# Altium PCB Watch_PCB_ASCII.PcbDoc
Units mm, origin at the board's own origin, x right, y up, seen from the top; angles counter-clockwise.
Board outline 38.1 x 68.58 mm, 2 copper layers (Top Layer, Bottom Layer); 86 components, 82 nets, 318 pads, 74 vias.
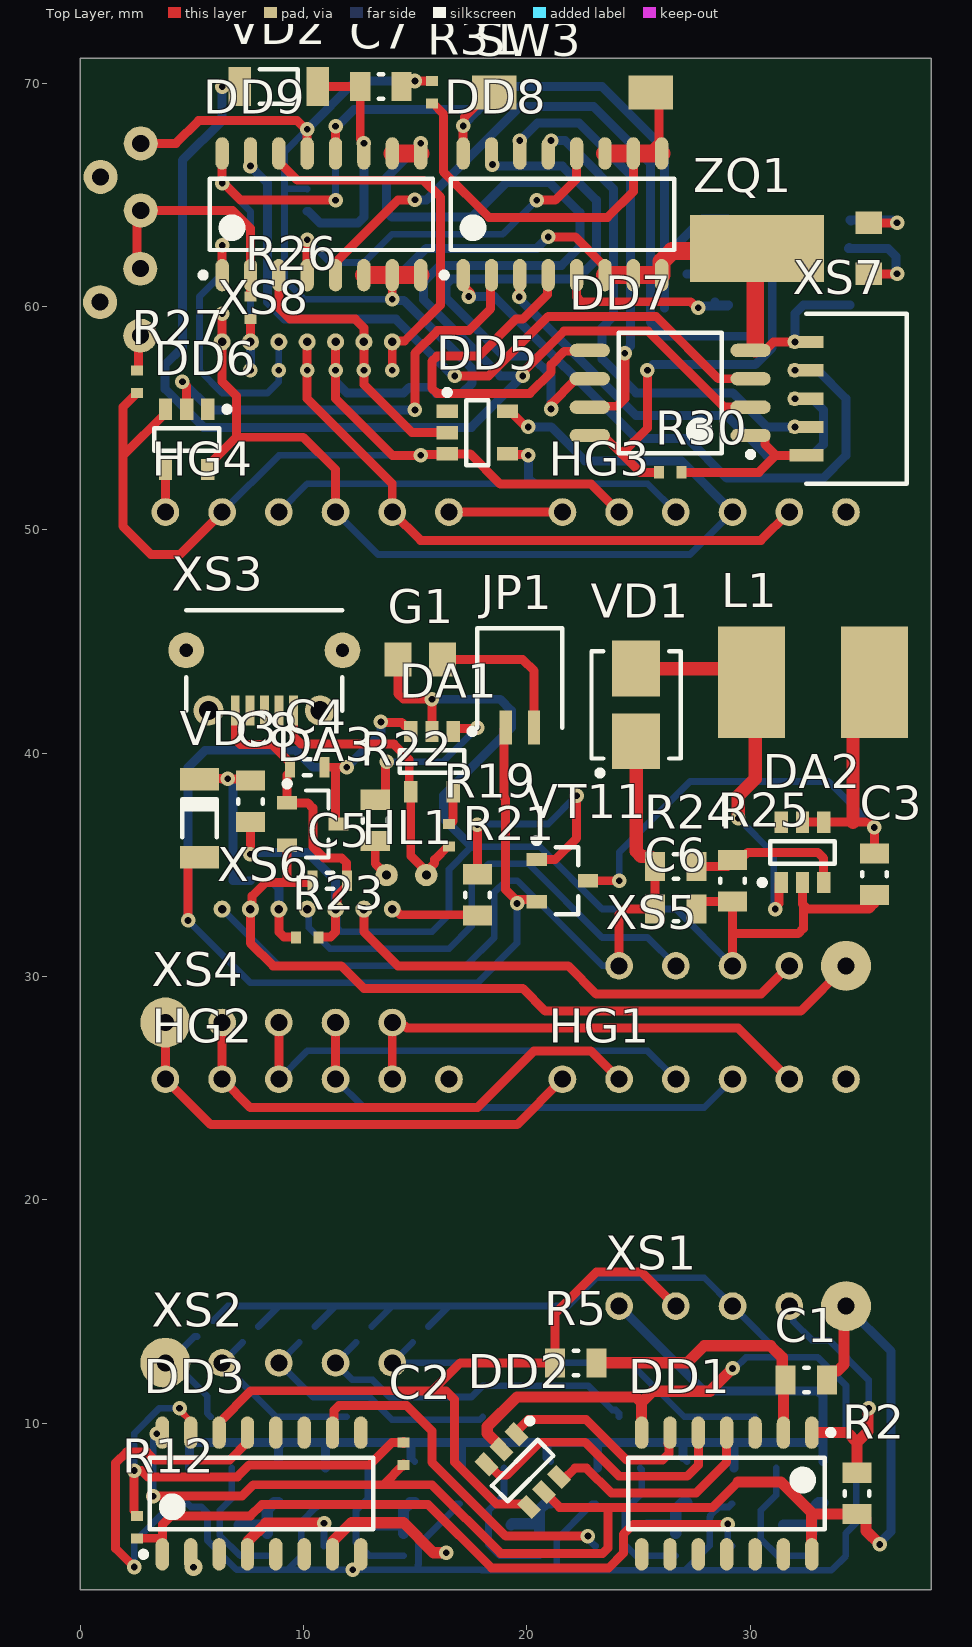
[diagram p0: Top Layer view]
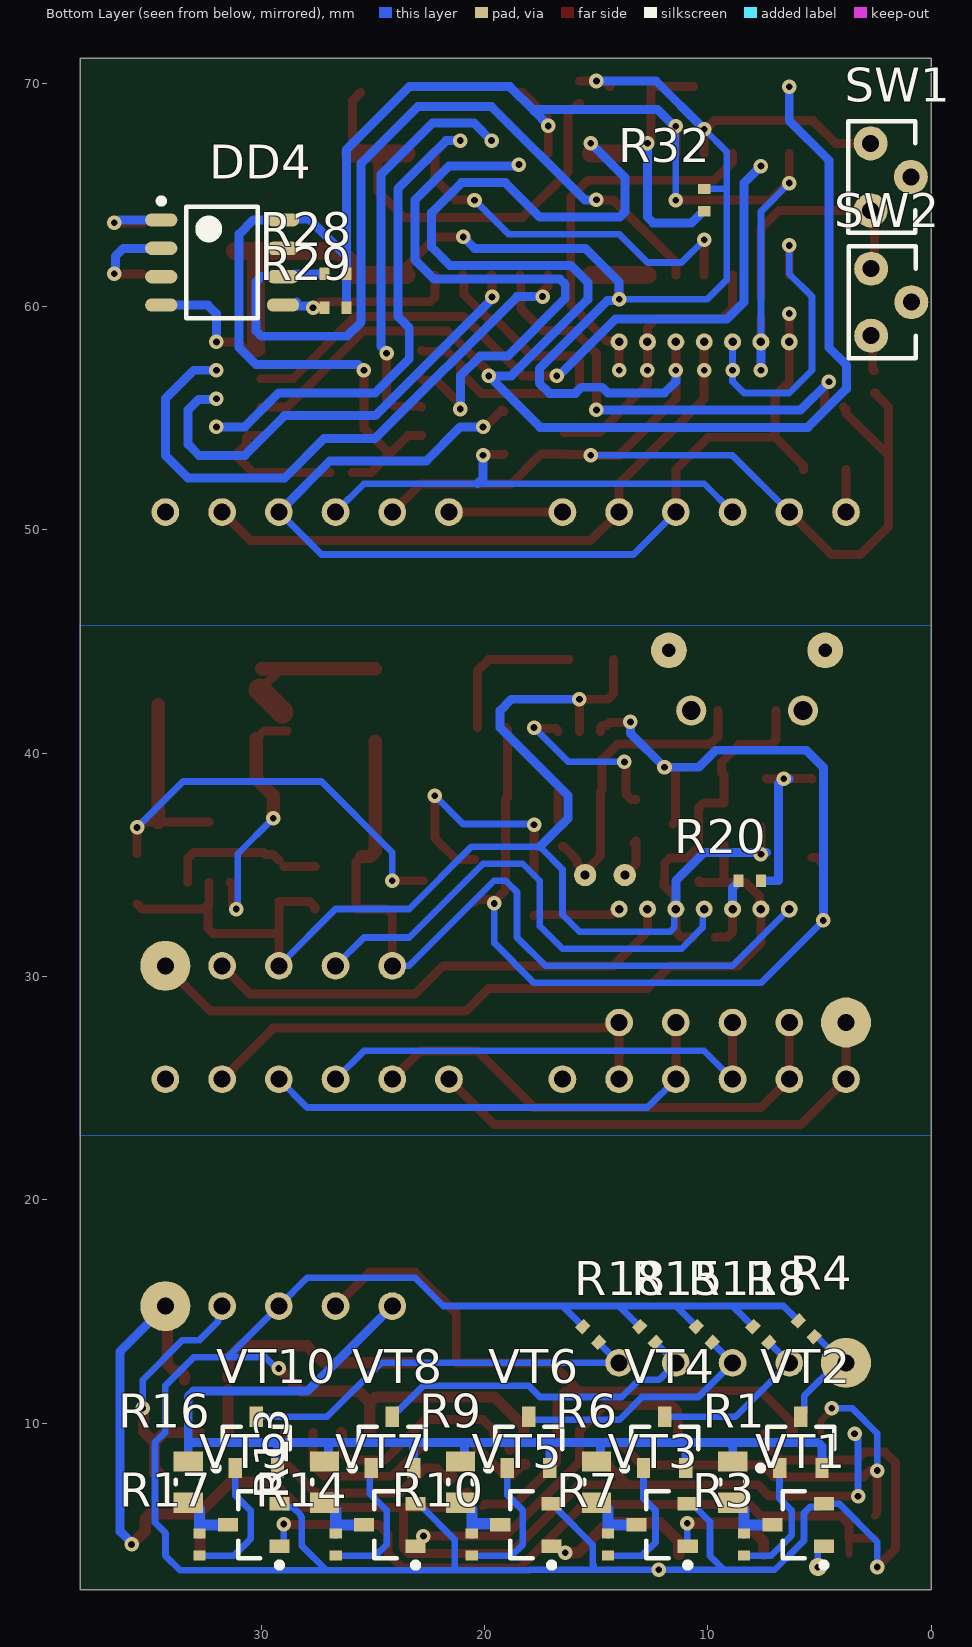
[diagram p1: Bottom Layer view, seen from below]

## Layer stack, top to bottom
Top Solder: solder mask 0.0102, Solder Resist, Dk 3.5
Top Layer: signal copper 0.0356
Dielectric 1: dielectric 0.32, FR-4, Dk 4.8
Bottom Layer: signal copper 0.0356
Bottom Solder: solder mask 0.0102, Solder Resist, Dk 3.5

## Board outline
0,2.54 38.1,2.54 38.1,71.12 0,71.12

## Design rules (kind name [scope] priority, off if disabled: settings)
AssemblyTestPointUsage [All] p0: scope1count=1 scope1_0_kind=Board scope1_0_value=Board scope2count=1 scope2_0_kind=Board scope2_0_value=Board commentlength=0
AssemblyTestpoint [All] p0: scope1count=1 scope1_0_kind=Board scope1_0_value=Board scope2count=1 scope2_0_kind=Board scope2_0_value=Board commentlength=0
Clearance [All] p0: scope1count=1 scope1_0_kind=Board scope1_0_value=Board scope2count=1 scope2_0_kind=Board scope2_0_value=Board commentlength=0 gap=0.254
Clearance [All] p1: gap=0.254 ignorepadtopadclearanceinfootprint=FALSE except(0.1: Arc-Arc Arc-Track Arc-SMDPad Arc-THPad Track-Track Track-SMDPad Track-THPad SMDPad-SMDPad SMDPad-THPad THPad-THPad)
ComponentClearance [All] p0: scope1count=1 scope1_0_kind=Board scope1_0_value=Board scope2count=1 scope2_0_kind=Board scope2_0_value=Board commentlength=0 gap=0.254 collisioncheckmode=3
DiffPairsRouting [All] p0: scope1count=1 scope1_0_kind=Board scope1_0_value=Board scope2count=1 scope2_0_kind=Board scope2_0_value=Board commentlength=0
FabricationTestPointUsage [All] p0: scope1count=1 scope1_0_kind=Board scope1_0_value=Board scope2count=1 scope2_0_kind=Board scope2_0_value=Board commentlength=0 valid=0 allowmultiple=FALSE
FabricationTestpoint [All] p0: scope1count=1 scope1_0_kind=Board scope1_0_value=Board scope2count=1 scope2_0_kind=Board scope2_0_value=Board commentlength=0 side=3 testpointundercomponent=TRUE minsize=1.016 maxsize=2.54 preferedsize=1.524 minholesize=0 maxholesize=1.016 preferedholesize=0.813 testpointgrid=0.025
FanoutControl Fanout_BGA [All] p0 off: scope1count=1 scope1_0_kind=Board scope1_0_value=Board scope2count=1 scope2_0_kind=Board scope2_0_value=Board commentlength=69 // Protel DXP Scope 1 Expression Was: IsBGA   Fanout_BGA (Default Rule)
FanoutControl Fanout_LCC [All] p0 off: scope1count=1 scope1_0_kind=Board scope1_0_value=Board scope2count=1 scope2_0_kind=Board scope2_0_value=Board commentlength=69 // Protel DXP Scope 1 Expression Was: IsLCC   Fanout_LCC (Default Rule)
FanoutControl Fanout_SOIC [All] p0 off: scope1count=1 scope1_0_kind=Board scope1_0_value=Board scope2count=1 scope2_0_kind=Board scope2_0_value=Board commentlength=71 // Protel DXP Scope 1 Expression Was: IsSOIC   Fanout_SOIC (Default Rule)
FanoutControl Fanout_Small [All] p0 off: scope1count=1 scope1_0_kind=Board scope1_0_value=Board scope2count=1 scope2_0_kind=Board scope2_0_value=Board commentlength=84 // Protel DXP Scope 1 Expression Was: (CompPinCount < 5)   Fanout_Small (Default Rule)
FanoutControl Fanout_Default [All] p0: scope1count=1 scope1_0_kind=Board scope1_0_value=Board scope2count=1 scope2_0_kind=Board scope2_0_value=Board commentlength=30 // Fanout_Default (Default Rule)
FanoutControl Fanout_LCC [All] p1 off: bgadir=Out bgaviamode=Centered fanoutstyle=Auto fanoutdirection=Alternating viagrid=0.025 // Protel DXP Scope 1 Expression Was: IsLCC   Fanout_LCC (Default Rule)
FanoutControl Fanout_BGA [All] p2 off: bgadir=Out bgaviamode=Centered fanoutstyle=Auto fanoutdirection=Alternating viagrid=0.025 // Protel DXP Scope 1 Expression Was: IsBGA   Fanout_BGA (Default Rule)
FanoutControl Fanout_SOIC [All] p3 off: bgadir=Out bgaviamode=Centered fanoutstyle=Auto fanoutdirection=Alternating viagrid=0.025 // Protel DXP Scope 1 Expression Was: IsSOIC   Fanout_SOIC (Default Rule)
FanoutControl Fanout_Default [All] p4: bgadir=Out bgaviamode=Centered fanoutstyle=Auto fanoutdirection=Alternating viagrid=0.025 // Fanout_Default (Default Rule)
FanoutControl Fanout_Small [All] p5 off: bgadir=Out bgaviamode=Centered fanoutstyle=Auto fanoutdirection=Alternating viagrid=0.025 // Protel DXP Scope 1 Expression Was: (CompPinCount < 5)   Fanout_Small (Default Rule)
Height [All] p0: scope1count=1 scope1_0_kind=Board scope1_0_value=Board scope2count=1 scope2_0_kind=Board scope2_0_value=Board commentlength=0
HoleSize [All] p0: scope1count=1 scope1_0_kind=Board scope1_0_value=Board scope2count=1 scope2_0_kind=Board scope2_0_value=Board commentlength=0 absolutevalues=TRUE maxlimit=2.54 minlimit=0.025 maxpercent=80.000 minpercent=20.000
HoleToHoleClearance [All] p0: scope1count=1 scope1_0_kind=Board scope1_0_value=Board scope2count=1 scope2_0_kind=Board scope2_0_value=Board commentlength=0
LayerPairs [All] p0: scope1count=1 scope1_0_kind=Board scope1_0_value=Board scope2count=1 scope2_0_kind=Board scope2_0_value=Board commentlength=0 enforce=TRUE
MinimumSolderMaskSliver [All] p0: scope1count=1 scope1_0_kind=Board scope1_0_value=Board scope2count=1 scope2_0_kind=Board scope2_0_value=Board commentlength=0
NetAntennae [All] p0: scope1count=1 scope1_0_kind=Board scope1_0_value=Board scope2count=1 scope2_0_kind=Board scope2_0_value=Board commentlength=0
PasteMaskExpansion [All] p0: scope1count=1 scope1_0_kind=Board scope1_0_value=Board scope2count=1 scope2_0_kind=Board scope2_0_value=Board commentlength=0 expansion=0
PlaneClearance [All] p0: scope1count=1 scope1_0_kind=Board scope1_0_value=Board scope2count=1 scope2_0_kind=Board scope2_0_value=Board commentlength=0 clearance=0.508
PlaneConnect [All] p0: scope1count=1 scope1_0_kind=Board scope1_0_value=Board scope2count=1 scope2_0_kind=Board scope2_0_value=Board commentlength=0 planeconnectstyle=Relief reliefexpansion=0.508 reliefentries=4 reliefconductorwidth=0.254 reliefairgap=0.254
PolygonConnect [All] p0: scope1count=1 scope1_0_kind=Board scope1_0_value=Board scope2count=1 scope2_0_kind=Board scope2_0_value=Board commentlength=0 connectstyle=Relief reliefconductorwidth=0.254 reliefentries=4 polygonreliefangle="90 Angle"
PolygonConnect [All] p1: connectstyle=Relief reliefconductorwidth=0.254 reliefentries=4 polygonreliefangle="90 Angle" airgapwidth=0.254
RoutingCorners [All] p0: scope1count=1 scope1_0_kind=Board scope1_0_value=Board scope2count=1 scope2_0_kind=Board scope2_0_value=Board commentlength=0 cornerstyle=45-Degree minsetback=2.54 maxsetback=2.54
RoutingLayers [All] p0: scope1count=1 scope1_0_kind=Board scope1_0_value=Board scope2count=1 scope2_0_kind=Board scope2_0_value=Board commentlength=0 top layer=Automatic bottom layer=Automatic
RoutingPriority [All] p0: scope1count=1 scope1_0_kind=Board scope1_0_value=Board scope2count=1 scope2_0_kind=Board scope2_0_value=Board commentlength=0
RoutingTopology [All] p0: scope1count=1 scope1_0_kind=Board scope1_0_value=Board scope2count=1 scope2_0_kind=Board scope2_0_value=Board commentlength=0 topology=Shortest
RoutingVias [All] p0: scope1count=1 scope1_0_kind=Board scope1_0_value=Board scope2count=1 scope2_0_kind=Board scope2_0_value=Board commentlength=0 holewidth=0.711 width=1.27 viastyle="Through Hole" minholewidth=0.711 minwidth=1.27 maxholewidth=0.711 maxwidth=1.27
RoutingVias [All] p1: holewidth=0.711 width=1.27 viastyle="Through Hole" minholewidth=0.711 minwidth=1.27 maxholewidth=0.711 maxwidth=1.27
ShortCircuit [All] p0: scope1count=1 scope1_0_kind=Board scope1_0_value=Board scope2count=1 scope2_0_kind=Board scope2_0_value=Board commentlength=0 allowed=FALSE
SilkToBoardRegionClearance [All] p0: scope1count=1 scope1_0_kind=Board scope1_0_value=Board scope2count=1 scope2_0_kind=Board scope2_0_value=Board commentlength=0
SilkToSilkClearance [All] p0: scope1count=1 scope1_0_kind=Board scope1_0_value=Board scope2count=1 scope2_0_kind=Board scope2_0_value=Board commentlength=0
SilkToSolderMaskClearance [All] p0 off: scope1count=1 scope1_0_kind=Board scope1_0_value=Board scope2count=1 scope2_0_kind=Board scope2_0_value=Board commentlength=41 // Protel DXP Scope 1 Expression Was: IsPad
SilkToSolderMaskClearance [All] p1 off: minsilkscreentomaskgap=0.254 clearancetoexposedcopper=TRUE // Protel DXP Scope 1 Expression Was: IsPad
SolderMaskExpansion [All] p0: scope1count=1 scope1_0_kind=Board scope1_0_value=Board scope2count=1 scope2_0_kind=Board scope2_0_value=Board commentlength=0 expansion=0.102
SolderMaskExpansion [All] p1: expansion=0.102 istentingtop=FALSE
UnRoutedNet [All] p0: scope1count=1 scope1_0_kind=Board scope1_0_value=Board scope2count=1 scope2_0_kind=Board scope2_0_value=Board commentlength=0
UnpouredPolygon [All] p0: scope1count=1 scope1_0_kind=Board scope1_0_value=Board scope2count=1 scope2_0_kind=Board scope2_0_value=Board commentlength=0
Width [All] p0: scope1count=1 scope1_0_kind=Board scope1_0_value=Board scope2count=1 scope2_0_kind=Board scope2_0_value=Board commentlength=0 maxlimit=1 minlimit=0.15 preferedwidth=0.4
Width [All] p1: maxlimit=1 minlimit=0.15 preferedwidth=0.4
24 further rules are at their usual default settings.

## Classes and differential pairs
component class Supply_core: C3 C4 C5 C6 C8 DA1 DA2 DA3 G1 HG1 HG2 HL1 JP1 L1 R19 R20 R21 R22 R23 R24 R25 VD1 VD3 VT11 XS3 XS4 XS5 XS6
component class Display_driver: C1 C2 DD1 DD2 DD3 R1 R2 R3 R4 R5 R6 R7 R8 R9 R10 R11 R12 R13 R14 R15 R16 R17 R18 VT1 VT2 VT3 VT4 VT5 VT6 VT7 VT8 VT9 VT10 XS1 XS2
component class Control_core: C7 DD4 DD5 DD6 DD7 DD8 DD9 HG3 HG4 R26 R27 R28 R29 R30 R31 R32 SW1 SW2 SW3 VD2 XS7 XS8 ZQ1

## Components (designator, comment, footprint, x,y, rotation, side; value= is the part's Value field where it differs from the comment)
C1 "C0805" CHIP-0805 32.512,11.938 r180 top
C2 "C0805" CHIP-0402 14.47,8.628 r90 top
C3 "C0805" CHIP-0805 35.56,34.58 r90 top
C4 "C0805" CHIP-0603 10.16,39.37 r0 top
C5 "C0805" CHIP-0603 11.176,34.29 r180 top
C6 "C0805" CHIP-0805 26.67,33.02 r180 top
C7 "C0805" CHIP-0805 13.462,69.85 r0 top
C8 "C0805" CHIP-0805 7.62,37.846 r90 top
DA1 "LTC4054" SOT23-5 15.748,39.624 r270 top
DA2 "SX1308" SOT23-6 32.34,35.56 r90 top
DA3 "XC6206" SOT23-3 10.414,36.83 r0 top
DD1 "CD4024" SOIC-14 28.948,6.85 r270 top
DD2 "74LVC1G11" SOT23-6 19.812,7.874 r315 top
DD3 "CD4017" SOIC-16 8.12,6.85 r90 top
DD4 "DS1337" SOIC-8 31.75,61.976 r180 bottom
DD5 "74LV1T34" SOT23-5 17.78,54.356 r0 top
DD6 "74LV1T34" SOT23-5 4.765,54.055 r270 top
DD7 "ATtiny85" SOIC-8-ATtiny85 26.416,56.134 r180 top
DD8 "CD4053" SOIC-16 21.59,64.135 r90 top
DD9 "CD4053" SOIC-16 10.795,64.135 r90 top
G1 "Battery" BATTERY 16.224,44.196 r180 top
HG1 "HDSP-2000_Colums" HDSP-2000_COL 21.59,25.4 r0 top
HG2 "HDSP-2000_Colums" HDSP-2000_COL 3.81,25.4 r0 top
HG3 "HDSP-2000_SPI" HDSP-2000_SPI 34.29,50.8 r180 top
HG4 "HDSP-2000_SPI" HDSP-2000_SPI 16.51,50.8 r180 top
HL1 "LED" LED_1 12.954,34.544 r0 top
JP1 "Jamper" JAMPER 20.32,41.148 r180 top
L1 "L" L_SMD 35.56,43.18 r180 top
R1 "R0805" CHIP-0805 8.882,7.358 r90 bottom
R2 "R0805" CHIP-0805 34.79,6.85 r270 top
R3 "R0805" CHIP-0402 8.374,4.564 r270 bottom
R4 "R0805" CHIP-0402 5.588,14.224 r225 bottom
R5 "R0805" CHIP-0805 22.189,12.7 r180 top
R6 "R0805" CHIP-0805 14.978,7.358 r90 bottom
R7 "R0805" CHIP-0402 14.47,4.564 r270 bottom
R8 "R0805" CHIP-0402 7.62,13.97 r225 bottom
R9 "R0805" CHIP-0805 21.074,7.358 r90 bottom
R10 "R0805" CHIP-0402 20.566,4.564 r270 bottom
R11 "R0805" CHIP-0402 10.16,13.97 r225 bottom
R12 "R0805" CHIP-0402 2.54,5.342 r270 top
R13 "R0805" CHIP-0805 27.17,7.358 r90 bottom
R14 "R0805" CHIP-0402 26.662,4.564 r270 bottom
R15 "R0805" CHIP-0402 12.7,13.97 r225 bottom
R16 "R0805" CHIP-0805 33.266,7.358 r90 bottom
R17 "R0805" CHIP-0402 32.758,4.564 r270 bottom
R18 "R0805" CHIP-0402 15.24,13.97 r225 bottom
R19 "R0805" CHIP-0402 16.51,36.322 r90 top
R20 "R0805" CHIP-0402 8.12,34.29 r0 bottom
R21 "R0805" CHIP-0805 17.78,33.655 r90 top
R22 "R0805" CHIP-0805 13.208,36.993 r90 top
R23 "R0805" CHIP-0402 10.16,31.75 r0 top
R24 "R0805" CHIP-0805 26.67,34.925 r180 top
R25 "R0805" CHIP-0805 29.21,34.29 r90 top
R26 "R0402" CHIP-0402 7.62,59.944 r270 top
R27 "R0402" CHIP-0402 2.54,56.634 r270 top
R28 "R0402" CHIP-0402 26.67,61.468 r180 bottom
R29 "R0402" CHIP-0402 26.67,59.944 r180 bottom
R30 "R0402" CHIP-0402 26.416,52.578 r180 top
R31 "R0402" CHIP-0402 15.748,69.596 r90 top
R32 "R0402" CHIP-0402 10.16,64.77 r90 bottom
SW1 "Button" BUTTON 2.707,67.31 r270 bottom
SW2 "Button" BUTTON 2.685,61.698 r270 bottom
SW3 "Switch" SWITCH 25.542,69.596 r180 top
VD1 "SS34" DIOD 24.892,42.164 r90 top
VD2 "BAS85" DIOD_MELF 8.89,69.85 r180 top
VD3 "BAS85" DIOD_MELF 5.334,37.084 r270 top
VT1 "2N7000" SOT23-3 5.95,5.442 r0 bottom
VT2 "BC808" SOT23-3 5.834,9.136 r90 bottom
VT3 "2N7000" SOT23-3 12.046,5.442 r0 bottom
VT4 "BC808" SOT23-3 11.93,9.136 r90 bottom
VT5 "2N7000" SOT23-3 18.142,5.442 r0 bottom
VT6 "BC808" SOT23-3 18.026,9.136 r90 bottom
VT7 "2N7000" SOT23-3 24.238,5.442 r0 bottom
VT8 "BC808" SOT23-3 24.122,9.136 r90 bottom
VT9 "2N7000" SOT23-3 30.334,5.442 r0 bottom
VT10 "BC808" SOT23-3 30.218,9.136 r90 bottom
VT11 "AO3401A" SOT23-3 21.59,34.29 r0 top
XS1 "Socket" SOCKET#1 24.13,15.24 r0 top
XS2 "Socket" SOCKET#2 3.81,12.7 r0 top
XS3 "Micro_USB" Micro_USB 8.24,41.91 r180 top
XS4 "Socket" SOCKET#2 3.81,27.94 r0 top
XS5 "Socket" SOCKET#1 24.13,30.48 r0 top
XS6 "Socket_7" SOCKET_7 6.35,33.02 r0 top
XS7 "Prog_connector" Prog_connector 32.512,53.34 r90 top
XS8 "Socket_7" SOCKET_7 6.35,58.42 r0 top
ZQ1 "HZ" HZ 35.306,62.611 r90 top

## Footprints (in the part's own frame and the unit in brackets; to place one, negate y for a bottom-side part, rotate by r counter-clockwise, add the part's x,y. Pads: shape width x height; smd on the part's side, far side on the other; paste and mask are expansions set on the pad)
BATTERY [mm]
  rect 1.2x1.524 smd: 1(0,0) 2(2,0)
BUTTON [mil]
  round 60 hole 30: 1(0,0) 2(118.11,0) 3(59.06,70.87)
  silkscreen extent -39,-39 157,79
CHIP-0402 [mm] "Chip Resistor, 2-Leads, Body 1,00x0,50mm, IPC Medium Density"
  rect 0.45x0.55 smd: 1(-0.5,0) 2(0.5,0)
CHIP-0603 [mm] "Chip Capacitor, 2-Leads, Body 1,55x0,85mm, IPC Medium Density"
  rect 0.45x0.9 smd: 1(-0.775,0) 2(0.775,0)
  silkscreen extent -0.15,-0.35 0.15,0.35
CHIP-0805 [mm] "Chip Resistor, 2-Leads, Body 2,00x1,25mm, IPC Medium Density"
  rect 0.9x1.3 smd: 1(-0.925,0) 2(0.925,0)
  silkscreen extent -0.1,-0.55 0.1,0.55
DIOD [mm] "Molded Diode, 2-Leads, Body 4,40x3,63mm, IPC Medium Density"
  rect 2.5x2.15 smd: 1(-1.625,0) 2(1.625,0)
  silkscreen extent -3.17,-2 2.4,2
DIOD_MELF [mm] "MELF Diode, 2-Leads, Body 3,50x1,53mm, IPC Medium Density"
  rect 1x1.75 smd: 1(-1.75,0) 2(1.75,0)
  silkscreen extent -0.85,-0.77 0.85,0.77
HDSP-2000_COL [mm]
  round 1.24 hole 0.762: 1(0,0) 2(2.54,0) 3(5.08,0) 4(7.62,0) 5(10.16,0) 6(12.7,0)
HDSP-2000_SPI [mm]
  round 1.24 hole 0.762: 7(0,0) 8(2.54,0) 9(5.08,0) 10(7.62,0) 11(10.16,0) 12(12.7,0)
HZ [mm]
  rect 1x1.2 smd: 1(-1.143,0) 2(1.143,0)
  rect 3x6 smd: 3(0,5)
JAMPER [mm]
  rect 0.55x1.524 smd: 1(0,0) 2(1.27,0)
  silkscreen extent -1.27,-4.44 2.54,0
L_SMD [mm]
  rect 3x5 smd: 1(0,0) 2(5.5,0)
LED_1 [mm]
  round 1 hole 0.4: 1(0.762,0) 2(2.54,0)
Micro_USB [mm]
  rect 0.4x1.35 smd: 1(-1.3,0) 2(-0.65,0) 3(0,0) 4(0.65,0) 5(1.3,0)
  round 1.35 hole 0.85: 6(-2.5,0) 7(2.5,0)
  round 1.6 hole 0.6: 8(-3.5,-2.7) 9(3.5,-2.7)
  silkscreen extent -3.5,-4.5 3.5,0
Prog_connector [mm]
  rect 0.55x1.524 smd: 1(0,0) 2(1.27,0) 3(2.54,0) 4(3.81,0) 5(5.08,0)
  silkscreen extent -1.27,-4.5 6.35,0
SOCKET#1 [mm]
  round 1.24 hole 0.762: 1(0,0) 2(2.54,0) 3(5.08,0) 4(7.62,0)
  round 2.24 hole 0.762: 5(10.16,0)
SOCKET#2 [mm]
  round 2.24 hole 0.762: 1(0,0)
  round 1.24 hole 0.762: 2(2.54,0) 3(5.08,0) 4(7.62,0) 5(10.16,0)
SOCKET_7 [mil]
  round 30 hole 15: 1(0,0) 2(50,0) 3(100,0) 4(150,0) 5(200,0) 6(250,0) 7(300,0)
SOIC-8 [mm] "SOIC, 8-Leads, Body 4,88x3,90mm, Pitch 1,27mm, IPC Medium Density"
  oval 1.45x0.6 smd: 1(-2.725,1.905) 2(-2.725,0.635) 3(-2.725,-0.635) 4(-2.725,-1.905) 5(2.725,-1.905) 6(2.725,-0.635) 7(2.725,0.635) 8(2.725,1.905)
  silkscreen extent -2.85,-2.5 1.6,2.88
SOIC-8-ATtiny85 [mm] "SOIC, 8-Leads, Body 5,24x5,29mm, Pitch 1,27mm, IPC Medium Density"
  oval 1.8x0.6 smd: 1(-3.6,1.905) 2(-3.6,0.635) 3(-3.6,-0.635) 4(-3.6,-1.905) 5(3.6,-1.905) 6(3.6,-0.635) 7(3.6,0.635) 8(3.6,1.905)
  silkscreen extent -3.73,-2.7 2.3,2.88
SOIC-14 [mm] "SOIC, 14-Leads, Body 8,65x3,90mm, Pitch 1,27mm, IPC Medium Density"
  oval 1.45x0.6 smd: 1(-2.725,3.81) 2(-2.725,2.54) 3(-2.725,1.27) 4(-2.725,0) 5(-2.725,-1.27) 6(-2.725,-2.54) 7(-2.725,-3.81) 8(2.725,-3.81) 9(2.725,-2.54) 10(2.725,-1.27) 11(2.725,0) 12(2.725,1.27) 13(2.725,2.54) 14(2.725,3.81)
  silkscreen extent -2.85,-4.4 1.6,4.79
SOIC-16 [mm] "SOIC, 16-Leads, Body 9,90x3,90mm, Pitch 1,27mm, IPC Medium Density"
  oval 1.45x0.6 smd: 1(-2.725,4.445) 2(-2.725,3.175) 3(-2.725,1.905) 4(-2.725,0.635) 5(-2.725,-0.635) 6(-2.725,-1.905) 7(-2.725,-3.175) 8(-2.725,-4.445) 9(2.725,-4.445) 10(2.725,-3.175) 11(2.725,-1.905) 12(2.725,-0.635) 13(2.725,0.635) 14(2.725,1.905) 15(2.725,3.175) 16(2.725,4.445)
  silkscreen extent -2.85,-5 1.6,5.42
SOT23-3 [mm] "SOT23, 3-Leads, Body 2,90x2,30mm, Pitch 0,95mm, IPC Medium Density"
  rect 0.9x0.6 smd: 1(-1.15,0.95) 2(-1.15,-0.95) 3(1.15,0)
  silkscreen extent -1.27,-1.5 0.7,1.92
SOT23-5 [mm] "SOT23, 5-Leads, Body 2,85x2,80mm, Pitch 0,95mm, IPC Medium Density"
  rect 0.95x0.6 smd: 1(-1.35,0.95) 2(-1.35,0) 3(-1.35,-0.95) 4(1.35,-0.95) 5(1.35,0.95)
  silkscreen extent -1.47,-1.45 0.5,1.93
SOT23-6 [mm] "SOT23, 6-Leads, Body 2,85x2,80mm, Pitch 0,95mm, IPC Medium Density"
  rect 0.95x0.6 smd: 1(-1.35,0.95) 2(-1.35,0) 3(-1.35,-0.95) 4(1.35,-0.95) 5(1.35,0) 6(1.35,0.95)
  silkscreen extent -1.47,-1.45 0.5,1.92
SWITCH [mm]
  rect 2x1.524 smd: 1(0,0) 2(7,0)

## Via types
v1: diameter 0.65, hole 0.3, Top Layer to Bottom Layer, 73 vias
v2: diameter 0.8, hole 0.3, Top Layer to Bottom Layer, 1 vias

## Nets (pads, with @x,y where several pads share a name; then routed paths per layer and width w, separated by ;. In a path a pad name is that pad's centre, name@x,y a point inside that pad or via, vN(x,y) a via of type N, cw(c..) or ccw(c..) an arc to the next point about the centre after c; other vN are vias at no path point)
+3V3: DD4.8 DD7.8 DD8.16 DD9.12 DD9.16 R26.2 R28.2 R29.2 R30.2 SW3.2 XS8.2 | length 74.3
  Top Layer w0.4: DD9.16 v1(6.35,65.532) 6.418,65.532 7.18,64.77 v1(11.43,64.77) ; XS8.2 R26.2 ; DD9.12 v1(11.43,68.072) ; DD8.16 v1(17.145,68.092) 17.193,68.14 17.193,68.485 18.304,69.596 SW3.2 ; DD7.8 23.416,54.229 24.242,53.404 ; v1(25.4,57.15) 25.4,54.562 24.242,53.404 ; R30.2 25.067,52.578 24.242,53.404
  Bottom Layer w0.3: v1(6.35,65.532) 7.62,64.262 XS8.2 ; v1(11.43,64.77) v1(11.43,68.072)
  Bottom Layer w0.4: v1(7.62,57.15) XS8.2 ; v1(11.43,68.072) 11.498,68.072 12.26,68.834 17.78,68.834 17.78,68.765 ; v1(17.145,68.092) 17.145,68.13 17.78,68.765 ; v1(25.4,57.15) 25.654,57.404 30.226,57.404 30.988,58.166 30.988,63.246 30.353,63.881 DD4.8 28.987,63.919 27.851,63.919 26.17,62.238 ; R29.2 R28.2 26.17,62.238 ; 17.78,68.765 18.865,69.85 23.368,69.85 26.17,67.048 26.17,62.238
+3V3_D: C1.1 C2.1 DD1.14 DD2.5 DD3.16 R2.2 XS1.5 | length 62.4
  Top Layer w0.4: v1(3.269,6.731) 7.239,6.731 7.747,7.239 13.581,7.239 ; C2.1 13.581,7.239 ; DD2.5 21.463,6.223 21.621,6.223 23.622,6.223 ; 29.464,7.366 28.321,6.223 27.233,6.223 23.622,6.223 ; 13.581,7.239 15.748,7.239 18.823,4.164 23.388,4.164 23.622,4.399 23.622,6.223
  Top Layer w0.5: 29.464,7.366 31.369,7.366 32.81,5.925 R2.2 34.99,5.925 35.19,5.725 35.19,5.18 v1(35.806,4.564) ; 32.739,5.854 32.739,4.144 DD1.14 ; C1.1 33.437,12.138 33.637,12.338 33.902,12.338 34.195,12.631 34.195,15.145 XS1.5
  Bottom Layer w0.3: v1(3.269,6.731) 3.269,9.27 3.429,9.43 v1(3.429,9.525) ; v1(35.806,4.564) v1@35.806,4.644
  Bottom Layer w0.4: XS1.5 36.314,13.216 36.314,5.152 v1@35.806,4.644
+3V3_S: C5.2 DA3.2 XS5.5 XS6.2 | length 35.7
  Top Layer w0.4: DA3.2 9.264,34.321 9.144,34.201 ; C5.2 10.401,34.226 10.376,34.201 9.144,34.201 ; XS5.5 32.258,28.448 20.828,28.448 19.812,29.464 12.7,29.464 11.684,30.48 8.636,30.48 7.62,31.496 XS6.2 7.689,33.089 7.689,33.597 8.293,34.201 9.144,34.201
+5: DD5.5 DD6.5 HG3.9 HG4.9 XS8.1 | length 46.1
  Top Layer w0.4: DD6.5 5.715,52.88 6.985,54.15 ; v1(6.35,59.69) XS8.1 6.35,56.642 6.985,56.007 6.985,54.15 ; HG4.9 11.43,52.705 9.985,54.15 6.985,54.15 ; DD5.5 19.196,55.372 19.958,54.61 v1(20.066,54.61)
  Bottom Layer w0.3: HG4.9 13.335,48.895 27.305,48.895 HG3.9
  Bottom Layer w0.4: v1(20.066,54.61) 21.082,54.61 22.606,53.086 26.924,53.086 HG3.9
+5_D: R1.2 R6.2 R9.2 R13.2 R16.2 VT2.2 VT4.2 VT6.2 VT8.2 VT10.2 XS1.1 | length 51.6
  Bottom Layer w0.3: 10.914,9.136 10.98,9.07 ; R6.2@14.802,8.459 R6.2 ; 17.01,9.136 17.076,9.07 ; R9.2@20.898,8.459 R9.2 ; 23.106,9.136 23.172,9.07 ; R13.2@26.994,8.459 R13.2 ; 29.202,9.136 29.268,9.07
  Bottom Layer w0.4: VT2.2 4.884,8.96 5.06,9.136 8.882,9.136 9.058,9.136 ; R1.2 8.882,8.96 9.058,9.136 ; VT4.2 10.98,9.07 ; R6.2@14.802,8.459 14.802,9.136 ; VT6.2 17.076,9.07 ; R9.2@20.898,8.459 20.898,9.136 ; VT8.2 23.172,9.07 ; XS1.1 27.94,11.43 33.032,11.43 33.266,11.196 33.266,9.136 ; R13.2@26.994,8.459 26.994,9.136 ; VT10.2 29.268,9.07 ; R16.2 33.266,9.136 ; 9.058,9.136 10.914,9.136 14.802,9.136 ; 14.802,9.136 17.01,9.136 20.898,9.136 ; 20.898,9.136 23.106,9.136 26.994,9.136 ; 26.994,9.136 29.202,9.136 33.266,9.136
+5_S: C6.2 R24.2 VD1.1 XS5.1 XS6.1 | length 35.3
  Top Layer w0.4: XS5.1 24.13,32.786 24.364,33.02 C6.2 25.745,35.125 R24.2@25.495,35.375
  Top Layer w0.6: VD1.1 24.892,35.609 25.126,35.375 R24.2@25.495,35.375
  Bottom Layer w0.3: XS6.1 8.89,30.48 17.272,30.48 18.542,31.75 18.542,33.782 19.05,34.29 19.573,34.29 23.383,30.48 XS5.1
ADC_IN: DD7.3 DD9.15 | length 31.7
  Top Layer w0.4: v1(16.764,56.896) 18.288,56.896 20.955,59.563 25.781,59.563 28.575,56.769 DD7.3
  Bottom Layer w0.4: v1(7.62,66.294) 8.382,65.532 8.382,60.198 9.144,59.436 14.135,59.436 16.675,56.896 v1(16.764,56.896)
BAT_DIV: R20.2 R23.1 XS6.3 | length 3.3
  Top Layer w0.4: XS6.3 8.89,31.997 9.124,31.763 9.647,31.763 R23.1
  Bottom Layer w0.4: R20.2 8.62,34.24 8.89,33.97 XS6.3
BAT_IN: DD9.1 XS8.3 | length 13.2
  Top Layer w0.4: DD9.1 v1(6.35,62.738)
  Bottom Layer w0.3: v1(6.35,62.738) 6.35,61.468 5.334,60.452 5.334,57.15 6.35,56.134 8.382,56.134 8.89,56.642 v1(8.89,57.15) ; v1@8.763,57.277 8.89,57.404 XS8.3
BATTERY: C4.2 DA1.3 DA3.3 JP1.2 VD3.2 VT11.2 | length 53
  Top Layer w0.4: v1(4.826,32.512) 4.826,35.034 5.126,35.334 VD3.2 ; C4.2 11.436,39.37 ; DA3.3 11.536,36.83 11.436,36.93 11.436,39.37 ; v1(11.938,39.37) 11.436,39.37 ; v1(13.462,41.402) 13.479,41.385 14.387,41.385 14.523,41.249 14.698,41.249 14.798,41.149 DA1.3 ; JP1.2 18.975,41.073 18.975,38.027 19.05,37.952 19.05,33.889 19.499,33.44 20.34,33.44 VT11.2
  Bottom Layer w0.3: v1(4.826,32.512) 7.62,29.718 17.78,29.718 19.558,31.496 v1(19.558,33.274)
  Bottom Layer w0.4: v1(4.826,32.512) 4.826,39.37 5.588,40.132 9.652,40.132 10.414,39.37 v1(11.938,39.37) 13.462,40.894 v1(13.462,41.402)
Buttons: DD9.2 R26.1 SW1.2 SW2.1 | length 10.9
  Top Layer w0.4: SW2.1@2.54,61.884 2.54,64.31 6.81,64.31 7.62,63.5 DD9.2 R26.1
BYTE: DD6.4 HG4.12 | length 1.9
  Top Layer w0.4: HG4.12 3.813,50.803 3.813,52.703 DD6.4
CLK: DD1.1 R2.1 XS1.4 | length 12.3
  Top Layer w0.5: XS1.4 XS1.4@31.892,15.382 ; DD1.1 34.351,9.575 34.785,9.141 ; R2.1 34.59,7.775 34.785,7.97 34.785,9.141 ; v1(35.306,10.668) 35.277,10.639 35.277,9.634 34.785,9.141
  Bottom Layer w0.3: XS1.4 31.93,15.06 31.93,14.552 32.766,13.716 33.528,13.716 35.306,11.938 v1(35.306,10.668)
CLK_BUS: DD8.12 DD9.4 | length 16.9
  Top Layer w0.4: DD9.4 v1(10.16,62.992) ; v1(20.447,64.77) 21.267,64.77 22.225,65.728 DD8.12
  Bottom Layer w0.3: v1@10.227,63.059 v1(10.16,62.992) 11.176,61.976 12.7,61.976 13.97,63.246 18.923,63.246 v1(20.447,64.77) v1@20.493,64.816
CLK_PROG: DD8.13 XS7.2 | length 21.4
  Bottom Layer w0.4: v1(21.082,67.437) 21.717,67.437 22.606,66.548 23.876,65.278 23.876,59.563 23.368,59.055 23.368,57.658 24.892,56.134 29.21,56.134 30.734,54.61 v1(32.004,54.61)
Col1: R4.2 VT2.3 XS2.1 | length 5.4
  Bottom Layer w0.3: R4.2 5.224,13.881 5.118,13.881 3.937,12.7 XS2.1 4.191,12.7 5.684,11.207 5.684,10.436 VT2.3
Col2: R8.2 VT4.3 XS2.2 | length 7.9
  Bottom Layer w0.3: R8.2 XS2.2 8.764,10.286 VT4.3
Col3: R11.2 VT6.3 XS2.3 | length 11.5
  Bottom Layer w0.3: R11.2 XS2.3 10.422,11.168 12.946,11.168 13.962,10.152 17.892,10.152 VT6.3
Col4: R15.2 VT8.3 XS2.4 | length 15.5
  Bottom Layer w0.3: R15.2 XS2.4 12.192,11.938 13.083,11.938 13.853,11.168 17.518,11.168 18.026,11.676 22.732,11.676 23.822,10.586 23.972,10.586 24.122,10.436 VT8.3
Col5: R18.2 VT10.3 XS2.5 | length 18.5
  Bottom Layer w0.3: R18.2 XS2.5 24.63,12.7 27.044,10.286 VT10.3
D_OUT: DD6.2 DD8.2 | length 20.5
  Top Layer w0.4: v1(4.572,56.642) 4.765,56.449 DD6.2 ; v1(14.986,55.372) 14.986,57.912 16.002,58.928 17.399,58.928 18.377,59.906 18.377,61.372 DD8.2
  Bottom Layer w0.4: v1(4.572,56.642) 5.842,55.372 v1(14.986,55.372)
DATA: HG3.12 HG4.7 | length 5.1
  Top Layer w0.4: HG4.7 HG3.12
GATE: DD9.14 XS8.7 | length 17.2
  Top Layer w0.4: DD9.14 8.89,66.489 9.72,65.659 15.367,65.659 16.138,64.888 16.138,60.08 14.518,58.46 14.01,58.46 XS8.7 v1(13.97,57.15)
Gate1: DD3.2 VT1.1 | length 1.1
  Bottom Layer w0.3: VT1.1 5.072,4.22 v2(5.072,3.548)
Gate2: DD3.4 VT3.1 | length 5.4
  Top Layer w0.5: DD3.4 7.504,4.144 7.504,4.71 8.307,5.513 v1(10.914,5.513)
  Bottom Layer w0.3: VT3.1 10.914,4.51 v1(10.914,5.513)
Gate3: DD3.7 VT5.1 | length 6.6
  Top Layer w0.5: DD3.7 11.314,4.144 11.314,4.71 12.145,5.541 14.469,5.541 15.819,4.191 v1(16.383,4.191)
Gate4: DD3.10 VT7.1 | length 16.4
  Top Layer w0.3: DD3.10 DD3.10@11.352,9.632
  Top Layer w0.4: DD3.10@11.352,9.632 11.333,9.652 11.333,10.18 11.352,10.199 11.352,10.561 11.587,10.795 14.605,10.795 15.748,9.652 15.748,8.255 19.06,4.943 v1(22.733,4.943)
  Bottom Layer w0.3: v1(22.733,4.943) 22.733,4.807 23.048,4.492 VT7.1
Gate5: DD3.1 R12.2 VT9.1 | length 31.7
  Top Layer w0.3: DD3.1 DD3.1@3.675,4.842
  Top Layer w0.4: R12.2 3.675,4.842 3.675,5.453 4.064,5.842 7.62,5.842 8.128,6.35 15.581,6.35 18.421,3.51 23.659,3.51 24.321,4.172 24.321,5.017 24.765,5.461 v1@28.956,5.461
  Bottom Layer w0.3: v1(28.994,5.48) 28.994,4.642 29.144,4.492 VT9.1
GATE_S: R21.1 XS6.7 | length 3.9
  Top Layer w0.4: XS6.7 14.068,33.02 14.322,32.766 17.744,32.766 R21.1
GND: C7.2 DD4.4 DD5.3 DD6.3 DD7.4 DD8.6 DD8.7 DD8.8 DD9.6 DD9.7 DD9.8 DD9.13 HG3.11 HG4.11 R27.2 R31.2 R32.2 SW1.1 XS7.5 XS8.5 ZQ1.3 | length 120
  Top Layer w0.4: R27.2 2.49,56.134 2.465,56.109 2.465,56.059 1.905,55.499 1.905,53.32 ; SW1.1@2.54,67.31 SW1.1 4.281,67.31 5.297,68.326 9.711,68.326 10.092,67.945 v1(10.16,67.945) DD9.13 ; DD6.3@3.915,55.505 DD6.3 3.815,55.23 1.905,53.32 ; HG4.11 4.445,48.895 3.175,48.895 1.905,50.165 1.905,53.32 ; XS8.5 v1(11.43,57.15) 11.43,55.88 13.97,53.34 v1(15.24,53.34) 15.273,53.373 16.397,53.373 DD5.3 17.46,53.406 18.813,52.053 22.877,52.053 HG3.11 ; v1(13.97,60.325) DD9.7 ; C7.2 14.633,70.096 R31.2 ; v1(20.955,63.119) 22.157,63.119 23.341,61.935 23.495,61.781 DD8.6 ; DD7.4 DD7.4@30.134,58.039 ; DD7.4@30.226,58.131 DD7.4@30.134,58.039 ; ZQ1.3@30.226,62.484 ZQ1.3@30.226,62.738 ; v1(32.004,58.42) 31.051,58.42 30.67,58.039 DD7.4@30.134,58.039
  Top Layer w0.8: DD9.6 DD9.7 DD9.8 ; DD8.6 DD8.7 DD8.8 26.035,62.015 26.504,62.484 ZQ1.3@30.226,62.484 ; DD7.4@30.226,58.131 ZQ1.3@30.226,62.484 ; ZQ1.3@31.179,62.484 ZQ1.3@30.226,62.484
  Bottom Layer w0.3: HG4.11 8.89,53.34 v1(15.24,53.34) ; R32.2 10.152,65.278 9.144,65.278 ; v1(10.16,67.945) 9.144,66.929 9.144,65.278 ; v1(13.97,60.325) 10.033,60.325 9.144,61.214 9.144,65.278
  Bottom Layer w0.4: v1(10.16,67.945) 12.319,70.104 v1(14.986,70.104) ; XS8.5@11.361,58.351 XS8.5 ; v1(11.43,57.15) 11.43,56.642 11.938,56.134 14.478,56.134 14.732,56.388 15.662,56.388 15.933,56.117 17.087,56.117 17.543,56.573 17.543,57.219 14.485,60.277 14.018,60.277 v1(13.97,60.325) 13.97,61.087 15.494,62.611 20.447,62.611 v1(20.955,63.119) ; v1(32.004,58.42) 32.004,59.69 32.385,60.071 DD4.4
GND_D: DD1.7 DD2.2 DD3.8 DD3.13 R4.1 R8.1 R11.1 R15.1 R18.1 VT1.2 VT3.2 VT5.2 VT7.2 VT9.2 XS1.3 | length 125.6
  Top Layer w0.3: DD3.13@7.485,9.15 DD3.13
  Top Layer w0.4: v1(2.413,3.556) 1.584,4.385 1.584,8.217 2.07,8.703 2.985,8.703 3.342,8.346 6.681,8.346 DD3.13@7.485,9.15
  Top Layer w0.5: DD2.2 18.857,8.899 18.224,9.532 18.224,9.842 19.558,11.176 24.876,11.176 25.138,10.914 ; DD1.7 25.138,10.914 ; v1(29.21,12.446) 28.194,11.43 25.654,11.43 25.138,10.914 ; XS1.3@29.21,15.478 XS1.3 XS1.3@29.288,15.162
  Bottom Layer w0.3: v1(2.413,3.556) 2.413,4.684 4.121,6.392 VT1.2 4.95,6.242 5.426,6.242 5.579,6.089 5.692,5.976 5.692,4.745 7.002,3.435 9.277,3.435 ; R4.1 6.604,15.24 8.89,15.24 ; R8.1 8.89,15.24 ; R11.1 11.43,15.24 ; VT3.2 10.746,6.392 10.596,6.242 10.56,6.242 9.898,5.58 9.898,4.056 9.277,3.435 ; R15.1 13.97,15.24 ; R18.1 16.51,15.24 ; VT5.2 16.842,6.392 16.692,6.242 16.692,6.092 15.149,4.549 15.149,3.672 15.119,3.642 15.119,3.435 ; VT7.2 22.938,6.392 22.788,6.242 21.336,4.79 21.336,3.556 21.19,3.41 ; VT9.2 29.034,6.242 28.594,6.242 28.224,5.872 28.224,5.816 28.186,5.778 28.186,4.517 27.079,3.41 ; v1(29.21,12.446) 29.305,12.446 29.805,12.946 31.504,12.946 ; 8.89,15.24 11.43,15.24 ; 9.277,3.435 v1(12.198,3.435) 15.119,3.435 ; 11.43,15.24 13.97,15.24 ; 13.97,15.24 16.51,15.24 ; 15.119,3.435 17.965,3.435 17.99,3.41 21.19,3.41 ; 16.51,15.24 21.844,15.24 23.114,16.51 27.94,16.51 XS1.3 31.504,12.946 ; 21.19,3.41 21.336,3.41 27.079,3.41 ; 27.079,3.41 33.636,3.41 34.282,4.056 34.282,5.072 34.752,5.542 34.752,9.144 34.29,9.606 34.29,11.684 33.028,12.946 31.504,12.946
GND_S: C3.1 C4.1 C5.1 C6.1 C8.1 DA1.2 DA2.2 DA3.1 G1.2 R23.2 R25.1 XS3.5 XS5.3 XS6.5 | length 75.4
  Top Layer w0.4: XS3.5 6.94,40.62 7.174,40.386 8.594,40.386 9.385,39.595 C4.1 9.385,39.145 9.264,39.024 DA3.1 10.18,37.78 10.414,37.546 10.414,35.814 10.922,35.306 11.704,35.306 11.926,35.084 11.926,34.315 C5.1 11.951,34.065 11.499,33.613 11.499,33.089 XS6.5 11.43,31.997 11.196,31.763 10.685,31.763 10.672,31.75 R23.2 ; v1(7.62,35.469) C8.1@7.62,36.693 ; G1.2 14.224,42.672 14.478,42.418 v1(15.748,42.418) DA1.2 ; C6.1 27.595,33.115 27.845,33.365 R25.1 29.21,31.923 ; XS5.3 29.21,31.923 ; DA2.2 32.34,33.254 32.385,33.209 ; C3.1@35.56,33.254 35.326,33.02 32.574,33.02 32.385,33.209 ; 29.21,31.923 32.151,31.923 32.385,32.157 32.385,33.209
  Bottom Layer w0.3: XS6.5 11.499,32.951 11.499,32.189 11.684,32.004 15.748,32.004 16.51,32.766 16.51,34.798 17.526,35.814 20.574,35.814 23.368,33.02 26.67,33.02 XS5.3
  Bottom Layer w0.4: v1@7.366,35.56 10.16,35.56 11.43,34.29 XS6.5 ; v1(15.748,42.418) 18.796,42.418 19.304,41.91 19.304,41.148 16.256,38.1 16.256,37.084 17.526,35.814
HCLK: DD5.4 HG3.10 HG4.10 | length 21.3
  Top Layer w0.4: DD5.4 19.163,53.373 19.977,53.373 20.066,53.284 v1(20.066,53.34) ; HG3.10 HG3.10@26.71,50.84
  Bottom Layer w0.3: HG4.10 10.16,52.07 20.32,52.07 25.4,52.07 HG3.10
  Bottom Layer w0.4: v1(20.066,53.34) 20.066,52.324 20.32,52.07
MISO_PROG: DD8.1 XS7.4 | length 27.2
  Top Layer w0.4: DD8.1 17.145,60.931 17.478,60.598 17.478,60.531 v1(17.399,60.452)
  Bottom Layer w0.4: v1(17.399,60.452) 18.542,60.452 24.892,54.102 27.178,54.102 28.956,52.324 33.274,52.324 34.29,53.34 34.29,55.88 33.02,57.15 v1(32.004,57.15)
MOSI_PROG: DD8.3 XS7.3 | length 20.8
  Top Layer w0.4: v1(19.661,60.435) 19.673,60.447 19.673,61.398 DD8.3
  Bottom Layer w0.4: v1(19.661,60.435) 19.661,60.349 24.892,55.118 28.956,55.118 30.734,53.34 32.786,53.34 33.274,53.828 33.274,55.372 32.814,55.832 32.052,55.832 v1(32.004,55.88)
NetC1_2: C1.2 DD1.2 R5.1 | length 12.1
  Top Layer w0.5: R5.1 27.178,12.7 27.94,13.462 30.918,13.462 31.434,12.946 31.434,12.133 C1.2@31.496,12.07 ; DD1.2@31.469,9.594 DD1.2@31.469,10.046 ; DD1.2 C1.2@31.488,11.512
NetC2_2: C2.2 DD3.15 R12.1 | length 20.4
  Top Layer w0.3: 2.413,6.093 2.415,6.091 2.415,5.917 2.49,5.842 R12.1 ; v1(4.445,10.668) 4.445,10.581 4.945,10.081 DD3.15
  Top Layer w0.4: 2.413,6.093 v1(2.413,7.874) ; v1@2.54,7.874 2.748,7.874 3.03,7.592 7.034,7.592 7.57,8.128 12.954,8.128 13.962,9.136 C2.2@14.462,9.136
  Top Layer w0.5: v1(2.413,7.874) v1@2.54,7.874 ; C2.2@14.462,9.136 C2.2
  Bottom Layer w0.3: v1(2.413,7.874) 2.413,9.54 3.541,10.668 v1(4.445,10.668)
NetC3_2: C3.2 DA2.4 DA2.5 L1.1 VT11.3 | length 26
  Top Layer w0.4: VT11.3 v1(24.13,34.29) ; DA2.5 DA2.4 34.605,36.91 35.326,36.91 v1(35.56,36.676) C3.2
  Top Layer w0.6: 34.605,36.91 L1.1@34.605,42.164
  Bottom Layer w0.3: v1(24.13,34.29) 24.13,35.56 27.305,38.735 33.501,38.735 v1(35.56,36.676)
NetC7_1: C7.1 DD9.11 R32.1 VD2.1 | length 11.1
  Top Layer w0.4: VD2.1 C7.1 12.537,67.502 12.7,67.339 v1(12.7,67.31) DD9.11
  Bottom Layer w0.4: R32.1 10.21,64.27 10.726,63.754 12.446,63.754 12.7,64.008 v1(12.7,67.31)
NetC8_2: C8.2 R20.1 VD3.1 | length 8
  Top Layer w0.4: VD3.1 5.362,38.862 v1(6.604,38.862) ; v1@6.35,38.848 7.352,38.848 C8.2@7.366,38.862
  Bottom Layer w0.4: v1@6.367,38.845 6.37,38.848 6.384,38.862 v1(6.604,38.862) 6.841,38.625 6.841,34.307 6.858,34.29 R20.1
NetDA1_1: DA1.1 R22.2 | length 7.9
  Top Layer w0.4: R22.2 13.408,37.918 13.658,38.168 13.658,39.464 13.733,39.539 v1(13.733,39.607) ; DA1.1 16.698,41 16.798,41.1 17.732,41.1 v1(17.78,41.148)
  Bottom Layer w0.3: v1(13.733,39.607) 13.75,39.624 16.256,39.624 v1(17.78,41.148)
NetDA1_4: DA1.4 HL1.2 R19.1 XS3.1 | length 13.7
  Top Layer w0.4: XS3.1 9.54,40.752 9.889,40.403 14.039,40.403 14.732,39.71 14.732,38.34 DA1.4 14.798,35.402 15.494,34.706 15.869,35.082 15.869,35.231 16.46,35.822 R19.1
NetDA1_5: DA1.5 R19.2 | length 1.6
  Top Layer w0.4: R19.2@16.46,36.822 R19.2 16.56,36.822 16.698,36.96 DA1.5 DA1.5@16.686,38.262
NetDA2_1: DA2.1 L1.2 VD1.2 | length 19.3
  Top Layer w0.4: L1.2@28.848,40.995 29.871,40.995 30.226,40.64 ; L1.2@29.108,43.789 L1.2@30.06,42.837 ; v1(31.115,33.02) 31.115,33.088 31.29,33.263 31.29,34.11 DA2.1
  Top Layer w0.6: VD1.2 29.108,43.789 L1.2@29.972,43.789 ; v1(29.464,37.084) 29.464,38.1 30.226,38.862 30.226,40.64
  Top Layer w1: L1.2@29.06,41.837 L1.2@30.06,42.837
  Bottom Layer w0.3: v1@29.47,37.078 31.048,35.5 v1@31.048,33.02
NetDA2_3: DA2.3 R24.1 R25.2 | length 6.8
  Top Layer w0.4: R24.1 R25.2@28.982,34.925 ; R25.2 29.46,35.465 29.799,35.465 29.894,35.56 33.02,35.56 33.29,35.29 DA2.3
NetDD1_4: DD1.4 DD2.6 | length 10.1
  Top Layer w0.4: DD2.6@21.633,7.467 22.153,7.988 22.666,7.988 23.777,6.877 27.578,6.877 28.948,8.247 DD1.4
  Top Layer w0.5: DD2.6 21.562,7.467 DD2.6@21.633,7.467
NetDD1_5: DD1.5 DD2.3 | length 12.6
  Top Layer w0.4: DD2.3@18.256,8.157 18.75,7.663 19.093,7.663 20.574,9.144 22.606,9.144 24.13,7.62 27.178,7.62 27.678,8.12 DD1.5
  Top Layer w0.5: DD2.3 DD2.3@18.256,8.157
NetDD1_6: DD1.6 DD2.1 | length 9
  Top Layer w0.4: DD2.1@19.503,9.597 20.066,10.16 22.656,10.16 24.47,8.346 26.065,8.346 26.358,8.639 DD1.6@26.358,9.073
  Top Layer w0.5: DD2.1@19.503,9.597 19.503,9.526 DD2.1 ; DD1.6@26.358,9.073 26.408,9.123 DD1.6
NetDD4_1: DD4.1 ZQ1.2 | length 3.5
  Top Layer w0.4: ZQ1.2 v1(36.576,63.754)
  Bottom Layer w0.4: DD4.1@34.513,63.843 DD4.1 36.381,63.881 36.508,63.754 v1(36.576,63.754)
NetDD4_2: DD4.2 ZQ1.1 | length 4.4
  Top Layer w0.4: ZQ1.1 v1(36.576,61.468)
  Bottom Layer w0.4: DD4.2@34.398,62.611 34.437,62.649 DD4.2 36.167,62.611 36.528,62.25 36.528,61.516 v1(36.576,61.468)
NetDD7_5: DD7.5 DD8.4 | length 16.7
  Top Layer w0.4: DD8.4 20.917,61.372 20.917,60.541 19.812,59.436 19.506,59.436 17.855,57.785 15.982,57.785 15.748,57.551 15.748,56.351 15.982,56.117 20.135,56.117 21.082,57.064 21.082,57.404 21.679,58.001 22.778,58.001 DD7.5
NetDD7_6: DD7.6 DD8.15 | length 25.9
  Top Layer w0.4: v1(21.082,55.415) 21.082,55.635 22.151,56.704 22.751,56.704 DD7.6
  Bottom Layer w0.4: v1@18.415,66.421 18.542,66.294 21.59,66.294 23.114,64.77 23.114,62.103 22.242,61.231 16.617,61.231 16.383,60.997 16.383,60.366 18.964,57.785 20.193,57.785 21.082,56.896 v1(21.082,55.415)
  other v1: 18.458,66.363
NetDD7_7: DD7.7 DD8.14 | length 18.1
  Top Layer w0.4: DD7.7 22.854,55.537 24.041,55.537 24.384,55.88 v1(24.384,57.912)
  Bottom Layer w0.4: v1(19.685,67.437) 20.464,68.216 22.335,68.216 24.638,65.913 24.638,58.234 24.384,57.98 v1(24.384,57.912)
NetDD8_9: DD8.9 DD8.10 DD8.11 R31.1 SW3.1 | length 20.5
  Top Layer w0.4: R31.1 15.798,69.096 16.256,68.638 16.256,66.04 18.305,63.991 23.605,63.991 24.765,65.151 DD8.10 ; 25.4,66.86 25.908,67.368 25.908,69.23 SW3.1
  Top Layer w0.8: DD8.11 DD8.10 25.4,66.86 DD8.9
NetG1_1: G1.1 JP1.1 | length 6.8
  Top Layer w0.4: G1.1 19.812,44.196 20.32,43.688 JP1.1
NetHG1_1: HG1.1 HG2.1 XS4.1 | length 22
  Top Layer w0.4: XS4.1 HG2.1 5.842,23.368 19.558,23.368 HG1.1
NetHG1_2: HG1.2 HG2.2 XS4.2 | length 22.4
  Top Layer w0.4: XS4.2 HG2.2 7.62,24.13 17.78,24.13 20.32,26.67 22.86,26.67 HG1.2
NetHG1_3: HG1.3 HG2.3 XS4.3 | length 21.4
  Top Layer w0.4: HG2.3 XS4.3
  Bottom Layer w0.3: HG2.3 10.16,26.67 25.4,26.67 HG1.3
NetHG1_4: HG1.4 HG2.4 XS4.4 | length 21.4
  Top Layer w0.4: HG2.4 XS4.4
  Bottom Layer w0.3: HG2.4 12.7,24.13 27.94,24.13 HG1.4
NetHG1_5: HG1.5 HG2.5 XS4.5 | length 21.4
  Top Layer w0.4: HG2.5 XS4.5 14.131,27.779 14.531,27.779 14.624,27.686 29.464,27.686 HG1.5
NetHL1_1: HL1.1 R22.1 | length 1.9
  Top Layer w0.4: R22.1@13.299,35.977 R22.1 13.208,35.055 13.716,34.547 HL1.1
NetR1_1: R1.1 R3.1 VT1.3 | length 3
  Bottom Layer w0.5: VT1.3 8.221,5.442 8.374,5.594 ; R3.1 8.374,5.594 ; R1.1 8.682,6.433 8.374,6.125 8.374,5.594
NetR3_2: R3.2 VT2.1 | length 5.7
  Bottom Layer w0.3: VT2.1 6.784,6.626 6.246,6.088 6.246,4.975 7.157,4.064 R3.2
NetR6_1: R6.1 R7.1 VT3.3 | length 3
  Bottom Layer w0.5: VT3.3 14.317,5.442 14.47,5.594 ; R7.1 14.47,5.594 ; R6.1 14.778,6.433 14.47,6.125 14.47,5.594
NetR7_2: R7.2 VT4.1 | length 5.9
  Bottom Layer w0.3: VT4.1 12.88,6.626 12.342,6.088 12.342,4.975 12.342,4.66 12.938,4.064 R7.2
NetR9_1: R9.1 R10.1 VT5.3 | length 3
  Bottom Layer w0.5: VT5.3 19.342,5.492 20.463,5.492 20.566,5.594 ; R10.1 20.566,5.594 ; R9.1 20.874,6.433 20.566,6.125 20.566,5.594
NetR10_2: R10.2 VT6.1 | length 6.2
  Bottom Layer w0.3: VT6.1 18.976,6.784 18.28,6.088 18.28,4.564 18.78,4.064 R10.2
NetR13_1: R13.1 R14.1 VT7.3 | length 3
  Bottom Layer w0.5: VT7.3 26.509,5.442 26.662,5.594 ; R14.1 26.662,5.594 ; R13.1 26.97,6.433 26.662,6.125 26.662,5.594
NetR14_2: R14.2 VT8.1 | length 6.3
  Bottom Layer w0.3: VT8.1 25.138,7.92 25.138,6.85 24.376,6.088 24.376,4.564 24.876,4.064 R14.2
NetR16_1: R16.1 R17.1 VT9.3 | length 3
  Bottom Layer w0.5: VT9.3 32.605,5.442 32.758,5.594 ; R17.1 32.758,5.594 ; R16.1 33.066,6.433 32.758,6.125 32.758,5.594
NetR17_2: R17.2 VT10.1 | length 6.1
  Bottom Layer w0.3: VT10.1 31.168,6.784 30.472,6.088 30.472,4.818 31.226,4.064 R17.2
NetR21_2: R21.2 VT11.1 | length 11.3
  Top Layer w0.4: R21.2 v1(17.78,36.794) ; VT11.1 21.27,35.24 22.225,36.195 v1(22.225,38.1)
  Bottom Layer w0.3: v1@17.78,36.83 20.955,36.83 v1(22.225,38.1)
NetR27_1: R27.1 SW2.2 | length 1.7
  Top Layer w0.4: R27.1 2.587,57.134 2.612,57.159 2.612,58.626 SW2.2
NetXS5_2: XS5.2 XS6.4 | length 22.4
  Bottom Layer w0.3: XS6.4 10.229,32.951 10.229,32.189 11.176,31.242 16.51,31.242 17.526,32.258 17.526,34.29 18.288,35.052 20.066,35.052 23.368,31.75 25.4,31.75 XS5.2
NetXS5_4: XS5.4 XS6.6 | length 21.7
  Top Layer w0.4: XS6.6 12.7,32.004 14.224,30.48 21.844,30.48 23.114,29.21 30.48,29.21 XS5.4
PWM: HG3.8 HG4.8 XS8.4 | length 28
  Top Layer w0.4: XS8.4 10.16,55.88 13.97,52.07 HG4.8 15.24,49.53 30.48,49.53 HG3.8
  other v1: 10.16,57.15
PWM_D: DD2.4 DD3.14 R5.2 XS1.2 | length 33.8
  Top Layer w0.3: DD2.4@19.971,6.371 DD2.4
  Top Layer w0.4: DD3.14@6.215,10.025 7.639,11.449 14.876,11.449 14.895,11.43 15.748,11.43 ; DD2.4@19.971,6.371 18.648,6.371 16.764,8.255 16.764,11.049 16.383,11.43 15.748,11.43 ; XS1.2 25.146,16.764 23.114,16.764 21.264,14.914 R5.2 17.018,12.7 15.748,11.43
  Top Layer w0.5: DD3.14 DD3.14@6.215,10.025
RESET: DD7.1 R30.1 XS7.1 | length 7.6
  Top Layer w0.4: R30.1 30.388,52.578 31.15,53.34 ; DD7.1 30.562,54.229 30.654,54.137 30.654,53.836 31.15,53.34 ; XS7.1 31.15,53.34
SCL: DD4.6 DD9.5 R28.1 | length 36.2
  Top Layer w0.4: DD9.5 11.43,61.889 11.53,61.989 11.53,62.076 14.224,64.77 14.969,64.77 v1(14.986,64.787)
  Bottom Layer w0.4: v1(14.986,64.787) 15.003,64.77 15.494,64.77 19.685,68.961 22.987,68.961 25.527,66.421 25.527,59.309 26.162,58.674 29.992,58.674 30.226,58.908 30.226,61.107 29.992,61.341 28.546,61.341 28.419,61.468 R28.1
SCLK: DD5.2 DD9.3 XS8.6 | length 12.8
  Top Layer w0.4: DD9.3 8.89,59.944 9.398,59.436 12.319,59.436 12.7,59.055 XS8.6 12.7,56.515 14.859,54.356 DD5.2
  other v1: 12.7,57.15
SDA: DD4.5 DD8.5 R29.1 | length 8.7
  Top Layer w0.4: DD8.5 22.225,60.432 22.44,60.217 27.337,60.217 27.61,59.944 v1(27.678,59.944)
  Bottom Layer w0.4: v1(27.678,59.944) 27.746,59.944 27.834,60.033 28.987,60.033 DD4.5 28.546,60.071 DD4.5@28.419,60.198
SWITCH: DD7.2 DD9.9 DD9.10 VD2.2 | length 75.6
  Top Layer w0.4: v1(19.812,56.896) 19.812,57.059 21.662,58.909 25.419,58.909 28.829,55.499 DD7.2
  Top Layer w0.8: DD9.10 DD9.9
  Bottom Layer w0.4: v1(6.35,69.85) 6.35,68.326 4.572,66.548 4.572,58.166 3.793,57.387 3.793,56.319 5.519,54.593 17.509,54.593 v1(19.812,56.896) 18.796,56.896 15.367,60.325 15.367,61.087 16.129,61.849 21.549,61.849 22.369,62.669 22.369,64.208 21.028,65.549 19.067,65.549 17.526,64.008 13.95,64.008 13.716,64.242 13.716,65.786 v1(15.24,67.31)
pads on no net: DA2.6 DD1.3 DD1.8 DD1.9 DD1.10 DD1.11 DD1.12 DD1.13 DD3.3 DD3.5 DD3.6 DD3.9 DD3.11 DD3.12 DD4.3 DD4.7 DD5.1 DD6.1 HG1.6 HG2.6 HG3.7 SW1.3 SW2.3 XS3.2 XS3.3 XS3.4 XS3.6 XS3.7 XS3.8 XS3.9

## Polygon pours and split planes (outlines as drawn)
GND_S on Bottom Layer "GND_S_L02_P000" (solid, pour order 0): 0,45.72 0,22.86 38.1,22.86 38.1,45.72

## Silkscreen, mask and mechanical layers (free items; w line width, h text height)
Mechanical 15:
  lines w0.2: 0,15.875 20.32,15.875 20.955,15.875 22.225,17.145 22.86,17.145 38.1,17.145 ; 0,22.86 38.1,22.86 ; 0,31.75 3.81,31.75 3.81,45.72 ; 0,45.72 38.1,45.72 ; 0,48.26 38.1,48.26 ; 26.67,71.12 26.67,65.024 29.527,65.024 35.242,65.024 38.1,65.024 ; 0,2.54 0,71.12 2.54,71.12 6.35,71.12 38.1,71.12 38.1,4.318 38.1,2.54 0,2.54